# Altium PCB 1 NEW.PcbDoc
Units mm, origin at the board's own origin, x right, y up, seen from the top; angles counter-clockwise.
Board outline 152.4 x 101.6 mm, 2 copper layers (Top Layer, Bottom Layer); 25 components, 14 nets, 68 pads, 0 vias.
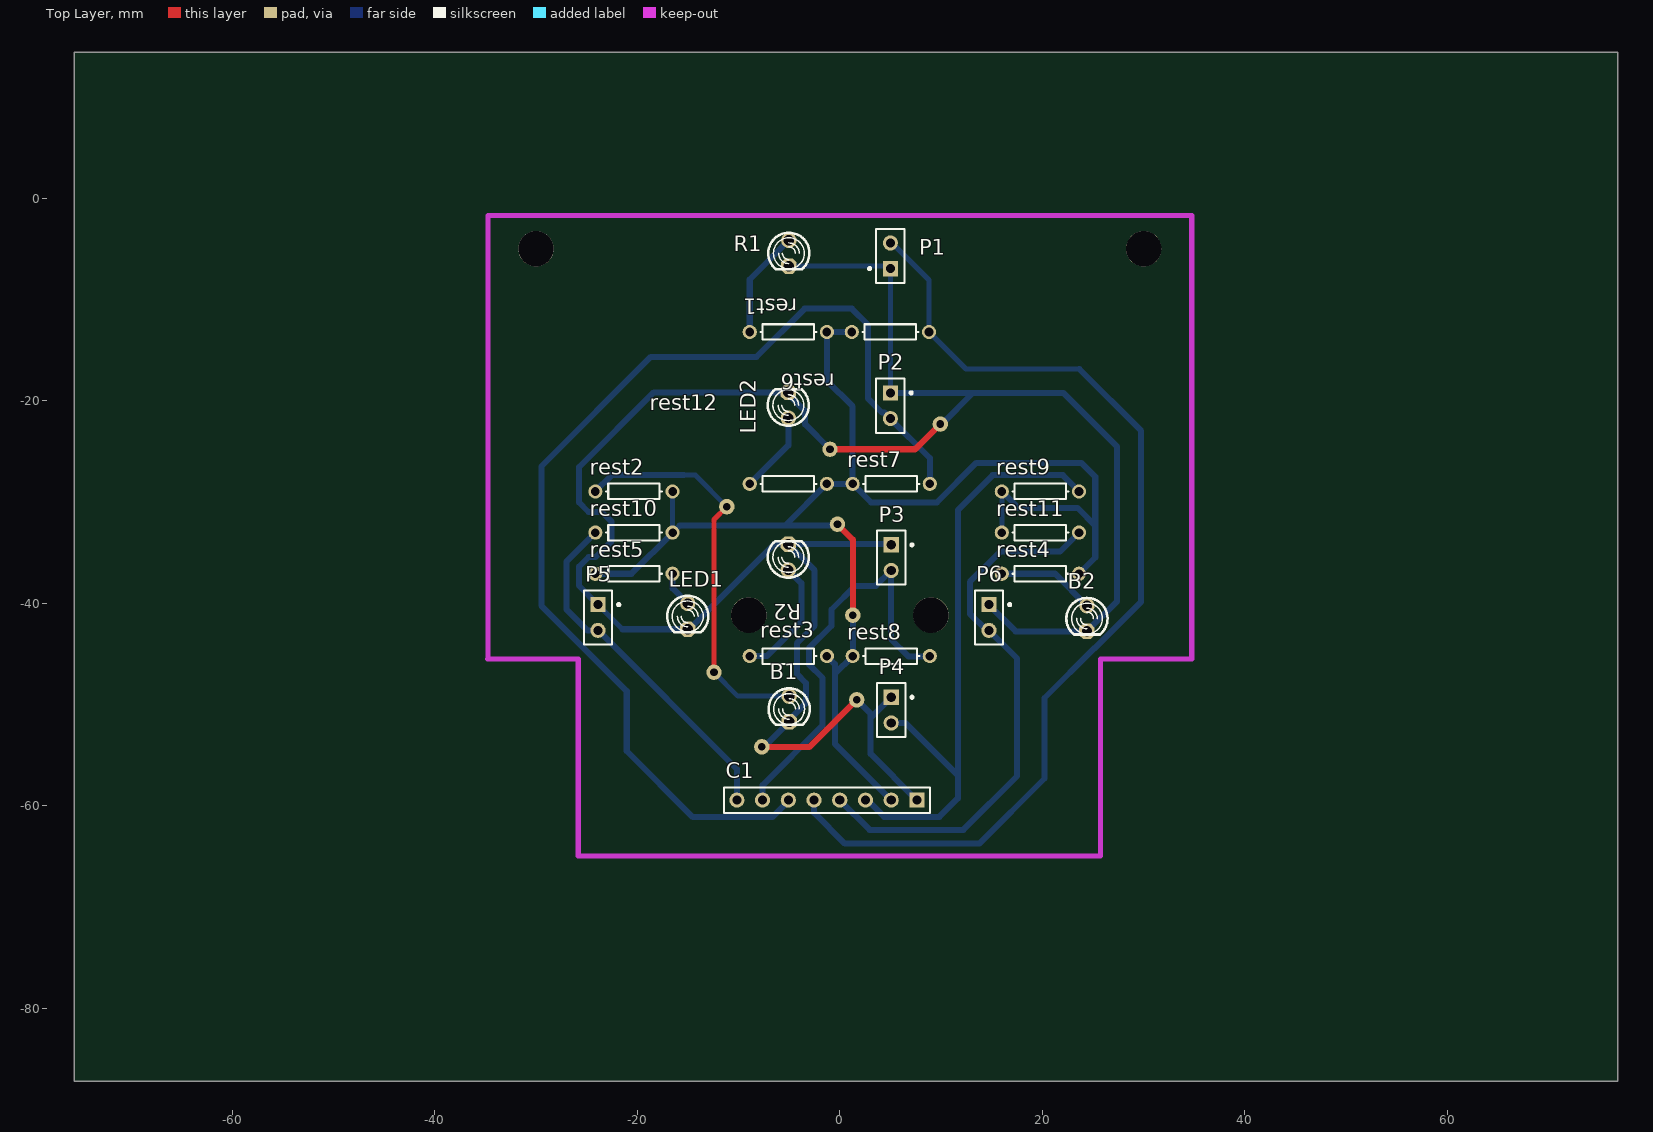
[diagram p0: Top Layer view]
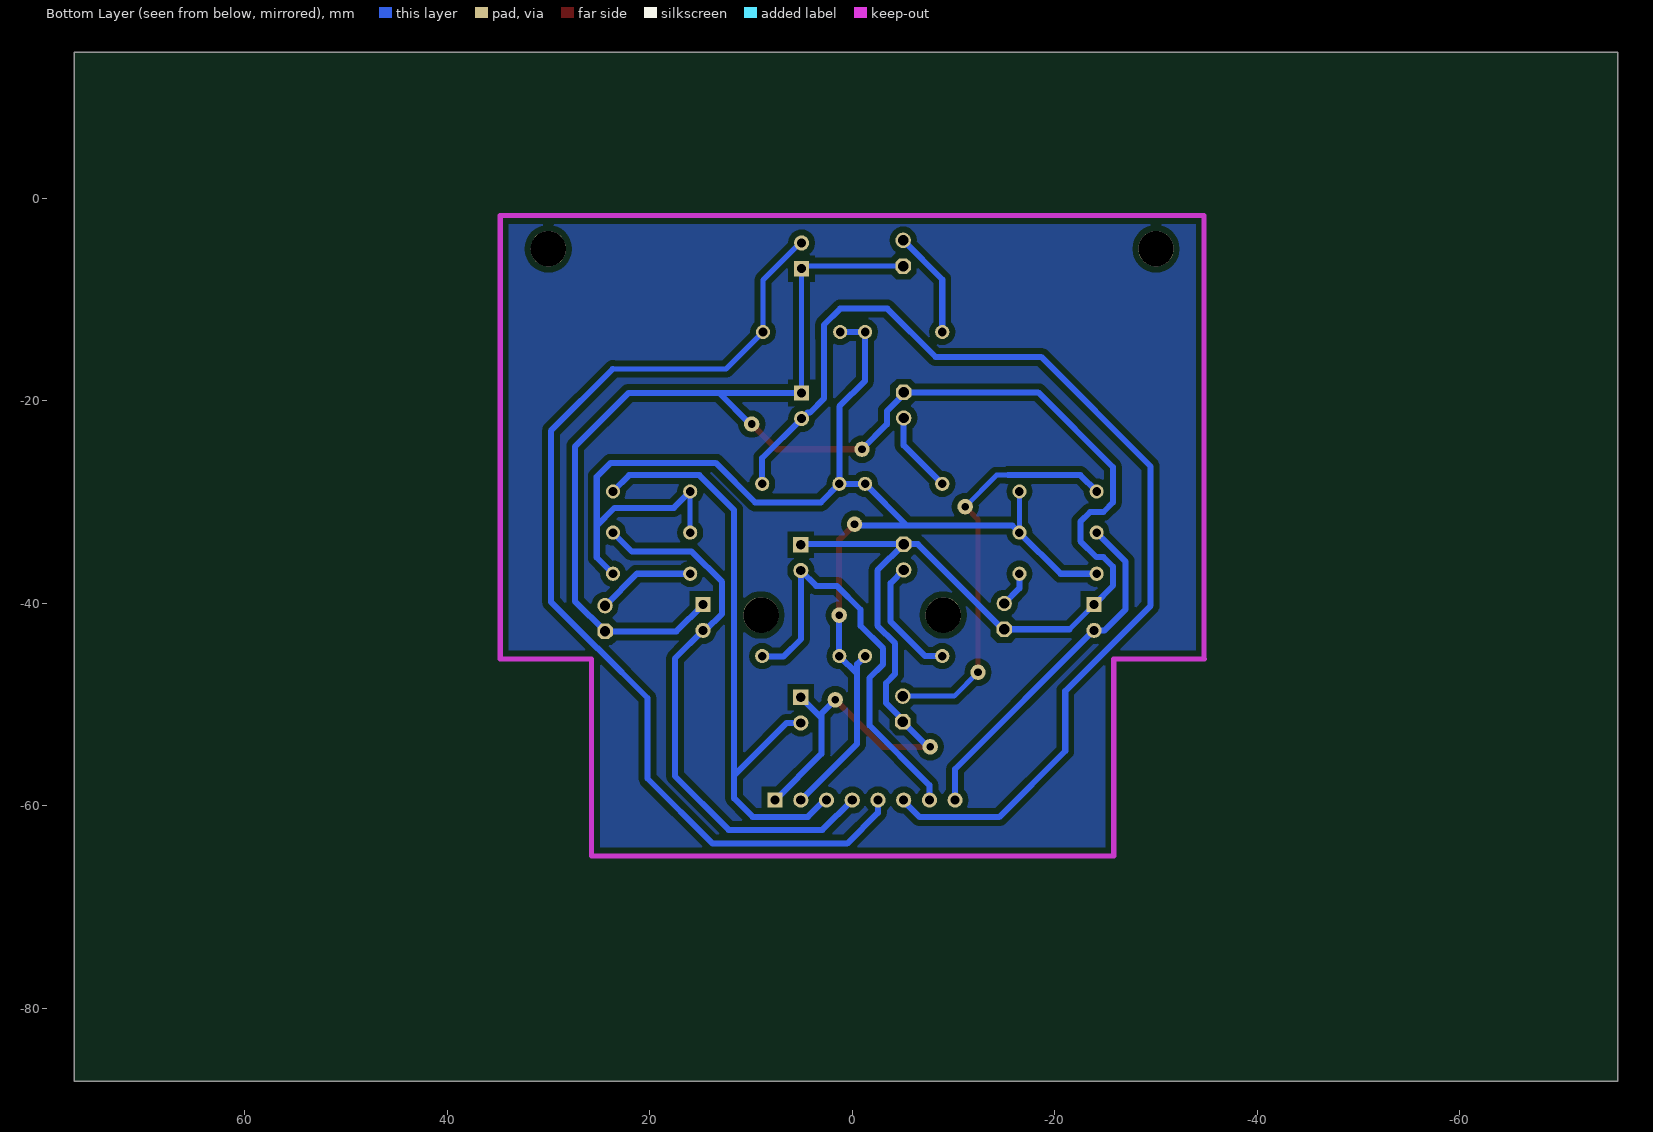
[diagram p1: Bottom Layer view, seen from below]

## Layer stack, top to bottom
Top Layer: signal copper 0.0356
Dielectric: dielectric 0.32, FR-4, Dk 4.8
Bottom Layer: signal copper 0.0356

## Board outline
-75.584,-87.193 76.816,-87.193 76.816,14.407 -75.584,14.407

## Design rules (kind name [scope] priority, off if disabled: settings)
Clearance [All] p1: gap=0.6
PolygonConnect [All] p1: connectstyle=Relief reliefconductorwidth=0.254 reliefentries=4 polygonreliefangle="90 Angle"
RoutingLayers [All] p1: top layer_v5=FALSE bottom layer_v5=TRUE
RoutingVias [All] p1: holewidth=0.711 width=1.27 viastyle="Through Hole" minholewidth=0.711 minwidth=1.27 maxholewidth=0.711 maxwidth=1.27
SilkscreenOverComponentPads [All] p1: minsilkscreentomaskgap=0.254
SolderMaskExpansion [All] p1: expansion=0.102
Width [All] p1: maxlimit=0.9 minlimit=0.5 preferedwidth=0.6
26 further rules are at their usual default settings.

## Components (designator, comment, footprint, x,y, rotation, side; value= is the part's Value field where it differs from the comment)
B1 "LED" My_LED3MM -5,-50.436 r270 top
B2 "LED" My_LED3MM 24.409,-41.504 r270 top
C1 "Header 8" HDR1X8 7.62,-59.436 r180 top
LED1 "LED" My_LED3MM -15.011,-41.292 r270 top
LED2 "LED" My_LED3MM -5.08,-20.436 r90 top
P1 "Photo Sen" PIN2 5,-6.96 r90 top
P2 "Photo Sen" PIN2 5,-19.224 r270 top
P3 "Photo Sen" PIN2 5.08,-34.224 r270 top
P4 "Photo Sen" PIN2 5.08,-49.276 r270 top
P5 "Photo Sen" PIN2 -23.876,-40.132 r270 top
P6 "Photo Sen" PIN2 14.732,-40.132 r270 top
R1 "LED" My_LED3MM -5.025,-5.436 r270 top
R2 "LED" My_LED3MM -5.08,-35.436 r90 top
rest1 "1k" AXIAL-0.3 -5.08,-13.208 r180 top
rest2 "100" AXIAL-0.3 -20.32,-28.956 r180 top
rest3 "1k" AXIAL-0.3 -5.08,-45.212 r180 top
rest4 "100" AXIAL-0.3 19.812,-37.084 r180 top
rest5 "1k" AXIAL-0.3 -20.32,-37.084 r0 top
rest6 "1k" AXIAL-0.3 5,-13.208 r0 top
rest7 "1k" AXIAL-0.3 5.08,-28.208 r0 top
rest8 "1k" AXIAL-0.3 5.08,-45.212 r0 top
rest9 "1k" AXIAL-0.3 19.812,-28.956 r0 top
rest10 "1k" AXIAL-0.3 -20.32,-33.02 r180 top
rest11 "1k" AXIAL-0.3 19.812,-33.02 r0 top
rest12 "1k" AXIAL-0.3 -5.08,-28.208 r180 top

## Footprints (in the part's own frame and the unit in brackets; to place one, negate y for a bottom-side part, rotate by r counter-clockwise, add the part's x,y. Pads: shape width x height; smd on the part's side, far side on the other; paste and mask are expansions set on the pad)
AXIAL-0.3 [mm] "Axial Device, Thru-Hole; 2 Leads; 0.3 in Pin Spacing"
  round 1.4 hole 0.85: 1(-3.81,0) 2(3.81,0)
  silkscreen extent -2.77,-0.76 2.77,0.76
HDR1X8 [mm] "Connector; Header; 8 Position"
  rect 1.5x1.5 hole 0.9: 1(0,0)
  round 1.5 hole 0.9: 2(2.54,0) 3(5.08,0) 4(7.62,0) 5(10.16,0) 6(12.7,0) 7(15.24,0) 8(17.78,0)
  silkscreen extent -1.27,-1.27 19.05,1.27
My_LED3MM [mil]
  round 60 hole 40: A(-50,0)
  oct 60x60 hole 40: K(50,0)
  silkscreen extent -80,-80 62,80
PIN2 [mm] "Photosensitive Diode; 2 Leads"
  rect 1.5x1.5 hole 0.9: 1(0,0)
  round 1.5 hole 0.9: 2(2.54,0)
  silkscreen extent -1.4,-1.4 3.94,2.17

## Part data
B1 B2 LED1 LED2 R1 R2: "Typical INFRARED GaAs LED"
C1: "Header, 8-Pin"
P1 P2 P3 P4 P5 P6: "Photosensitive Diode"
rest1 rest2 rest3 rest4 rest5 rest6 rest7 rest8 rest9 rest10 rest11 rest12: library part Res, "resistor 1/4 wat"

## Free pads (board coordinates)
  round 3.5 hole 3.5: 0(-29.993,-5) 0(-8.993,-41.162) 0(9.007,-41.162) 0(30.007,-5)
  round 1.524 hole 0.762: 0(-0.229,-32.182) 1(1.295,-41.173) 2(-11.151,-30.455) 3(-12.421,-46.812) 8(-0.965,-24.79) 9(9.931,-22.301) 12(-7.696,-54.178) 13(1.676,-49.53)

## Nets (pads, with @x,y where several pads share a name; then routed paths per layer and width w, separated by ;. In a path a pad name is that pad's centre, name@x,y a point inside that pad or via, vN(x,y) a via of type N, cw(c..) or ccw(c..) an arc to the next point about the centre after c; other vN are vias at no path point)
GND: B1.K B2.K C1.1 LED1.K LED2.K P1.1 P2.1 P3.1 P4.1 P5.1 P6.1 pad.8 pad.9 pad.12 pad.13 R1.K R2.K | length 227.4
  Top Layer w0.6: pad.12 -2.972,-54.178 pad.13 ; pad.8 7.442,-24.79 pad.9
  Bottom Layer w0.5: P5.1 -21.446,-42.562 ; R1.K 4.746,-6.706 P1.1 P2.1 ; B2.K@24.155,-43.028 B2.K
  Bottom Layer w0.6: P5.1 -25.749,-38.259 -25.749,-36.393 -24.784,-35.428 -24.098,-35.428 -22.523,-33.853 -22.523,-31.948 -23.488,-30.983 -24.809,-30.983 -25.749,-30.043 -25.749,-26.552 -18.362,-19.166 LED2.K -5.08,-19.355 -3.418,-21.017 -3.418,-22.338 pad.8 ; -21.456,-42.562 -21.446,-42.562 -14.876,-42.562 -6.48,-34.166 R2.K ; pad.12 -7.473,-54.178 B1.K -5,-51.516 -3.338,-49.854 -3.338,-47.868 -4.242,-46.965 -4.242,-43.963 -2.489,-42.21 -2.489,-36.756 R2.K ; pad.13 3.048,-50.902 3.048,-51.308 ; P2.1 13.157,-19.224 ; P4.1 3.048,-51.308 ; P3.1 5.022,-34.166 R2.K ; C1.1 3.048,-54.864 3.048,-51.308 ; pad.9 10.08,-22.301 13.157,-19.224 ; P6.1 17.374,-42.774 B2.K 27.356,-39.827 27.356,-24.511 22.069,-19.224 13.157,-19.224
NetB1_A: B1.A pad.2 pad.3 rest2.2 | length 40.2
  Top Layer w0.5: pad.3 -12.421,-31.725 pad.2
  Bottom Layer w0.5: -15.392,-27.351 -14.254,-27.351 pad.2 ; pad.3 -10.067,-49.166 B1.A
  Bottom Layer w0.6: rest2.2 -22.525,-27.351 -15.392,-27.351
NetB2_A: B2.A rest4.2 | length 9.7
  Bottom Layer w0.6: rest4.2 21.26,-37.084 B2.A
NetC1_3: C1.5 P1.2 rest6.2 | length 101.7
  Bottom Layer w0.5: P1.2 5.162,-4.42 8.81,-8.068 rest6.2 12.468,-16.866 23.647,-16.866
  Bottom Layer w0.6: C1.5 -2.54,-60.681 0.508,-63.729 13.792,-63.729 20.218,-57.302 20.218,-49.352 25.135,-44.436 25.163,-44.436 29.75,-39.849 29.75,-22.968 23.647,-16.866
NetC1_4: C1.6 P2.2 rest7.2 | length 108.7
  Bottom Layer w0.6: C1.6 -5.08,-59.533 -6.655,-61.107 -14.508,-61.107 -21.031,-54.585 -21.031,-48.666 -29.464,-40.234 -29.464,-26.492 -18.644,-15.672 -8.221,-15.672 -3.457,-10.908 1.191,-10.908 2.79,-12.507 2.79,-13.871 2.769,-13.892 2.769,-19.765 4.173,-21.17 4.406,-21.17 P2.2 8.89,-25.654 rest7.2
NetC1_5: C1.7 P3.2 rest8.2 | length 41.6
  Bottom Layer w0.6: C1.7 -7.62,-57.963 -1.702,-52.045 -1.702,-47.359 -3.042,-46.019 -3.042,-44.46 -0.813,-42.231 -0.813,-40.615 1.518,-38.284 3.56,-38.284 P3.2 5.08,-37.517 5.061,-37.536 5.061,-43.542 6.769,-45.25 8.776,-45.25 rest8.2@8.915,-45.11
NetC1_6: C1.3 P4.2 rest9.2 | length 61.8
  Bottom Layer w0.6: C1.3 2.747,-59.436 4.397,-61.086 9.831,-61.086 11.657,-59.26 11.657,-57.023 11.657,-56.996 ; P4.2 6.477,-51.816 11.657,-56.996 ; rest9.2 22.017,-27.351 15.1,-27.351 11.657,-30.794 11.657,-56.996
NetC1_7: C1.8 P5.2 rest10.2 | length 35.2
  Bottom Layer w0.6: rest10.2 -27,-35.89 -27,-40.59 -24.918,-42.672 -23.851,-42.672 -10.16,-56.363 C1.8
NetC1_8: C1.4 P6.2 rest11.2 | length 54.9
  Bottom Layer w0.6: C1.4 2.946,-62.382 12.192,-62.382 17.501,-57.074 17.501,-45.441 P6.2 14.499,-42.672 12.857,-41.029 12.857,-37.894 15.856,-34.895 21.747,-34.895 rest11.2
NetLED1_A: LED1.A rest5.2 | length 3.6
  Bottom Layer w0.6: rest5.2 -16.51,-38.523 LED1.A
NetLED2_A: LED2.A rest12.2 | length 8.1
  Bottom Layer w0.6: rest12.2 -5.08,-24.398 LED2.A
NetR1_A: R1.A rest1.2 | length 10.6
  Bottom Layer w0.6: rest1.2 -8.89,-8.03 R1.A
NetR2_A: R2.A rest3.2 | length 12.2
  Bottom Layer w0.6: rest3.2 -7.188,-45.212 -3.785,-41.808 -3.785,-38.001 R2.A
VCC: C1.2 pad.0@-0.229,-32.182 pad.1 rest1.1 rest2.1 rest3.1 rest4.1 rest5.1 rest6.1 rest7.1 rest8.1 rest9.1 rest10.1 rest11.1 rest12.1 | length 141.7
  Top Layer w0.6: pad.0@-0.229,-32.182 1.295,-33.706 pad.1
  Bottom Layer w0.5: rest10.1 rest2.1 ; rest11.1 rest9.1
  Bottom Layer w0.6: rest5.1 -20.574,-37.084 rest10.1 -15.806,-32.316 -5.378,-32.316 ; rest3.1 -0.483,-45.999 -0.483,-46.965 ; pad.0@-0.229,-32.182 -0.363,-32.316 -5.378,-32.316 ; rest6.1 rest1.1 -1.27,-18.022 1.27,-20.562 rest7.1 ; rest8.1 -0.483,-46.965 ; rest8.1@1.295,-45.187 pad.1 ; C1.2 -0.483,-53.873 -0.483,-46.965 ; rest9.1 17.623,-30.577 23.476,-30.577 25.229,-32.329 ; rest4.1 25.229,-35.477 25.229,-32.329 ; -5.378,-32.316 rest12.1 rest7.1 ; rest7.1 3.11,-30.048 9.577,-30.048 13.494,-26.132 23.857,-26.132 25.229,-27.503 25.229,-32.329

## Polygon pours and split planes (outlines as drawn)
no net on Bottom Layer "Top Layer-No Net" (solid, pour order 1000): -34.754,-1.727 34.755,-1.727 34.755,-45.353 34.595,-45.513 25.762,-45.513 25.762,-64.968 25.412,-64.618 -25.825,-64.618 -25.825,-45.875 -26.187,-45.513 -26.463,-45.237 -34.754,-45.237 -34.754,-2.083

## Keep-outs
Keep-Out Layer:
  lines w0.5: -34.773,-45.513 -25.825,-45.513 -25.825,-64.968 25.762,-64.968 25.762,-45.513 34.755,-45.513 34.755,-1.727 -34.754,-1.727 -34.754,-45.513